# Altium PCB ADCS_Sensor_Simulator.PcbDoc
Units mm, origin at the board's own origin, x right, y up, seen from the top; angles counter-clockwise.
Board outline 152.4 x 101.6 mm, 2 copper layers (Top Layer, Bottom Layer); 45 components, 36 nets, 211 pads, 74 vias.
Unrouted connection lines stored in the file: 1.
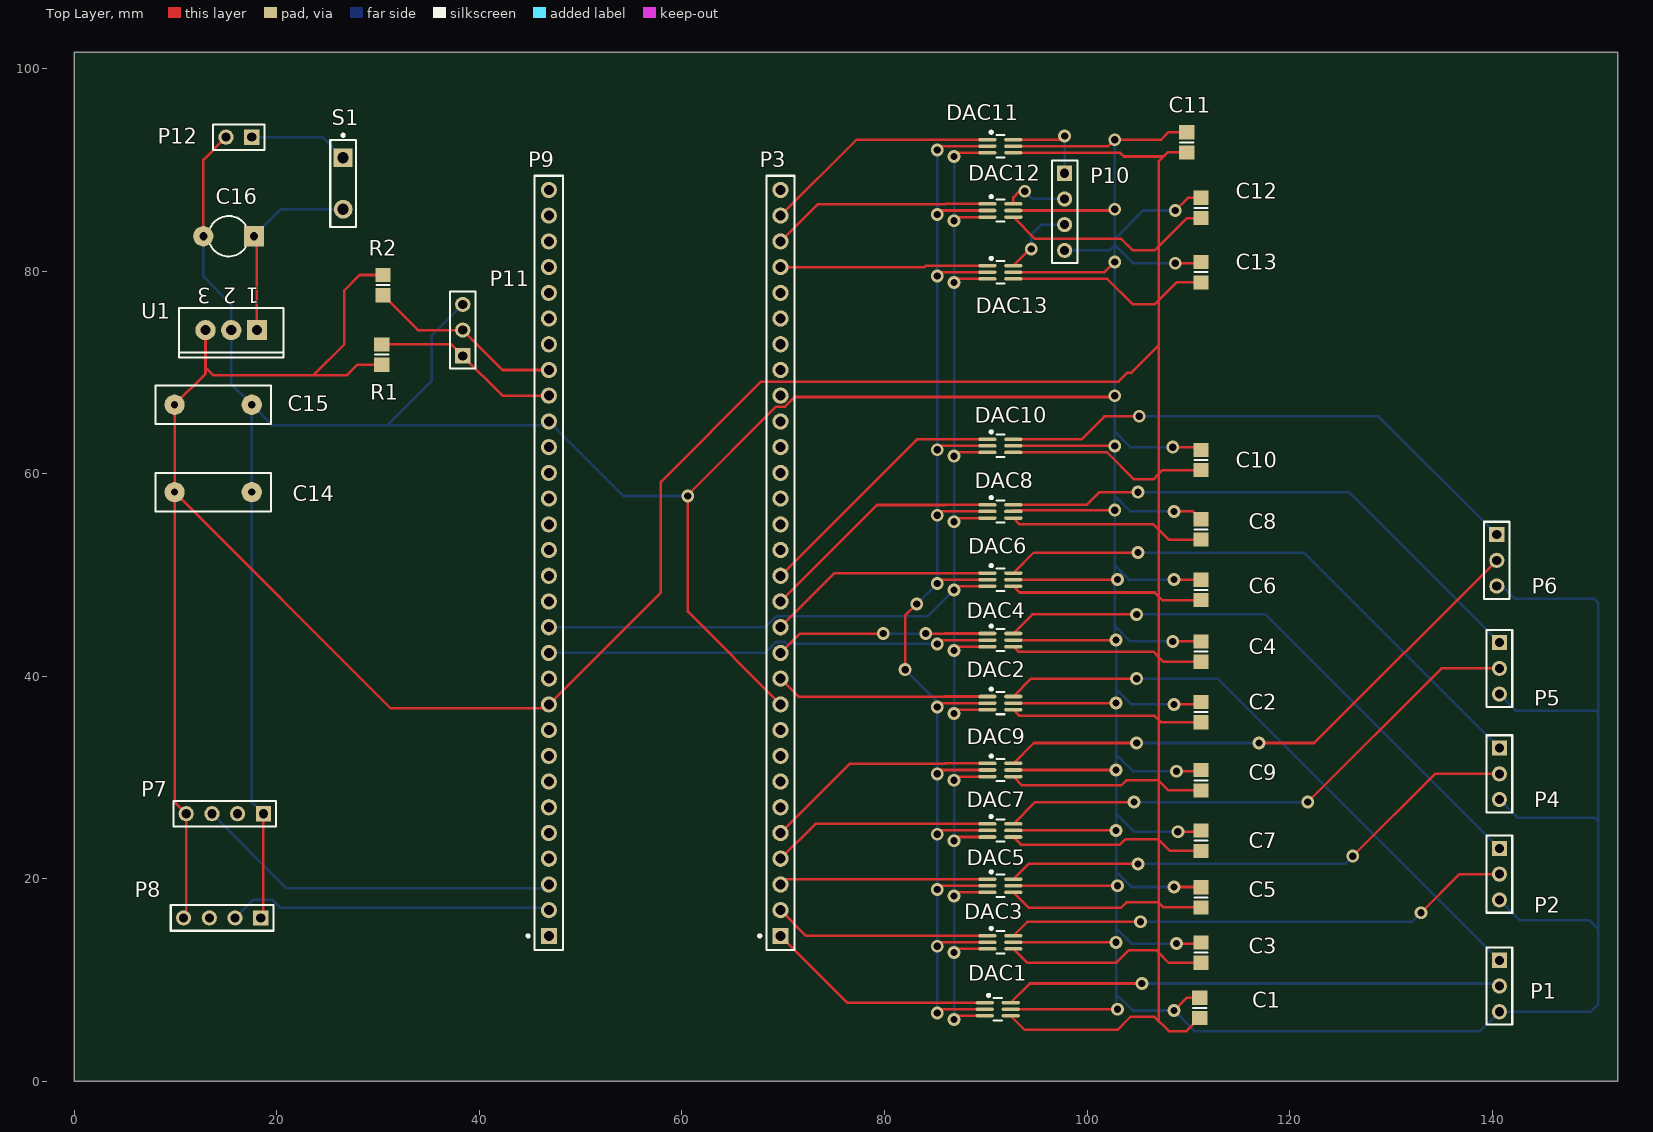
[diagram p0: Top Layer view]
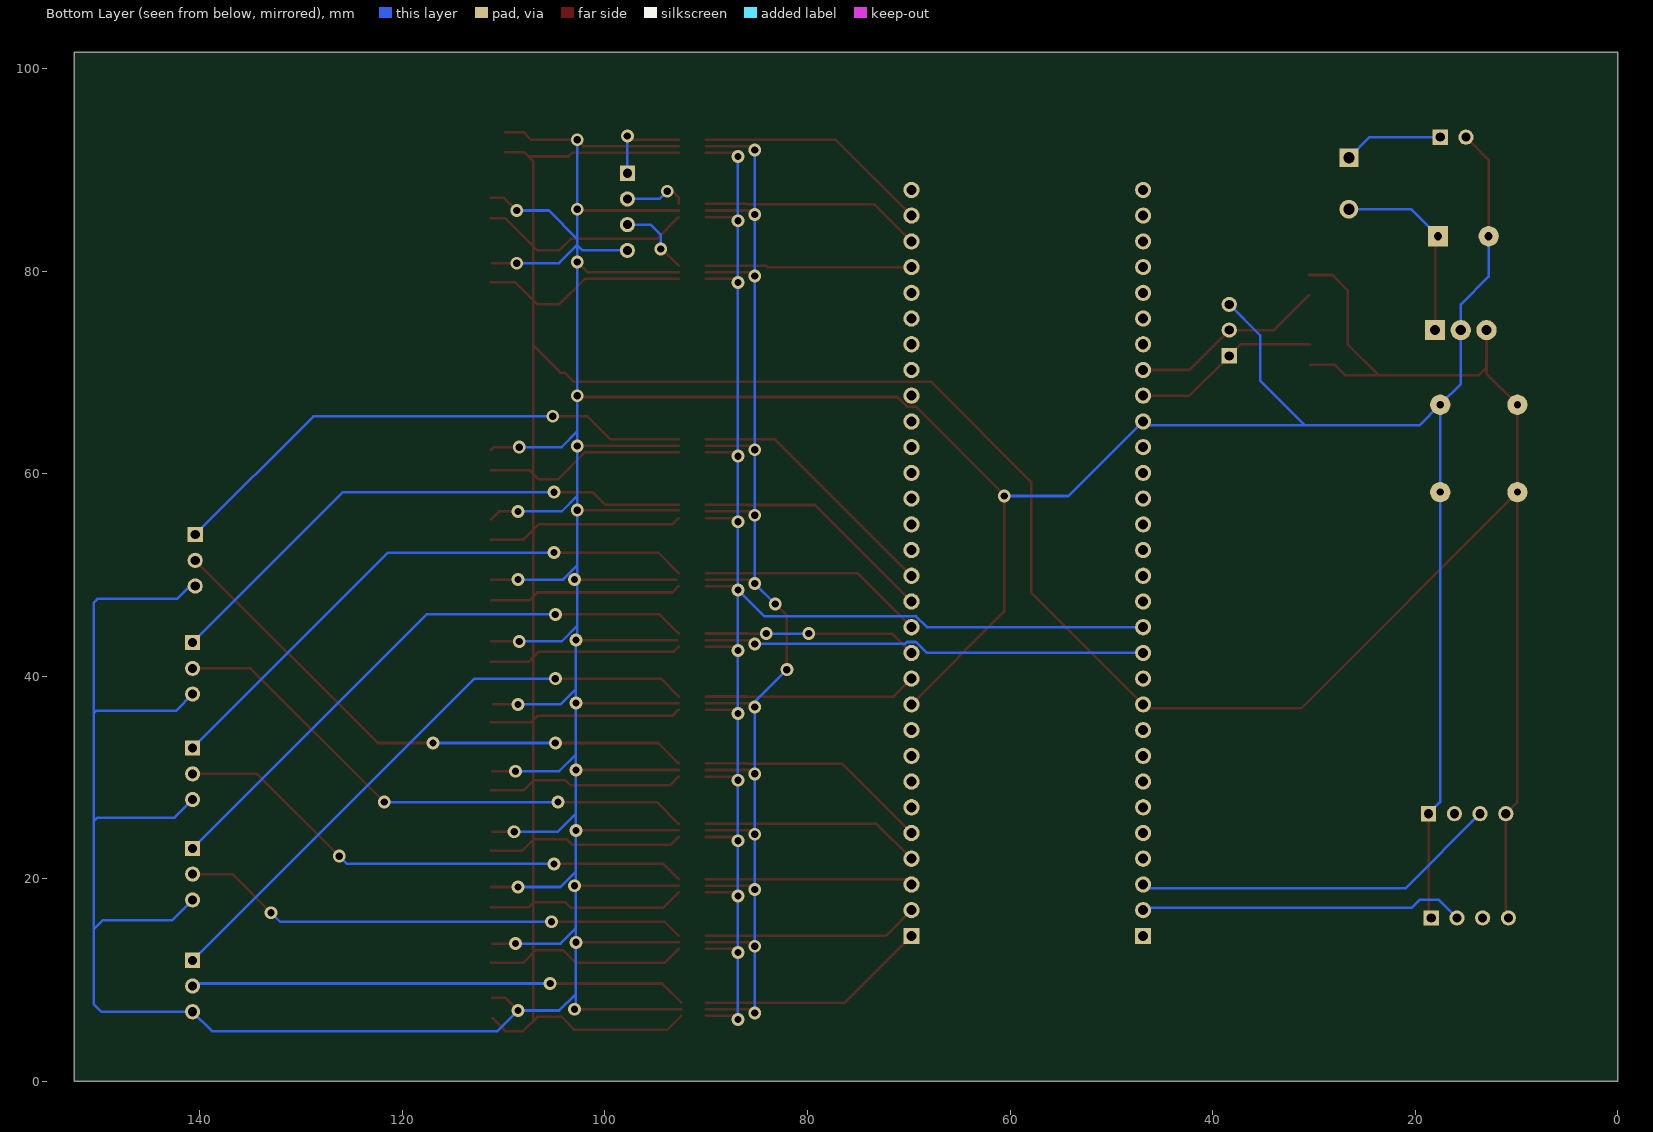
[diagram p1: Bottom Layer view, seen from below]

## Layer stack, top to bottom
Top Layer: signal copper 0.0356
Dielectric: dielectric 0.32, FR-4, Dk 4.8
Bottom Layer: signal copper 0.0356

## Board outline
0,0 152.4,0 152.4,101.6 0,101.6

## Design rules (kind name [scope] priority, off if disabled: settings)
Clearance [All] p1: gap=0.15
PolygonConnect [All] p1: connectstyle=Relief reliefconductorwidth=0.254 reliefentries=4 polygonreliefangle="90 Angle" airgapwidth=0.254
RoutingVias [All] p1: holewidth=0.711 width=1.27 viastyle="Through Hole" minholewidth=0.711 minwidth=1.27 maxholewidth=0.711 maxwidth=1.27
SolderMaskExpansion [All] p1: expansion=0.102
Width [All] p1: maxlimit=0.254 minlimit=0.254 preferedwidth=0.254
28 further rules are at their usual default settings.

## Components (designator, comment, footprint, x,y, rotation, side; value= is the part's Value field where it differs from the comment)
C1 "Regulator" 6-0805_M 111.125,7.239 r90 top
C2 "Regulator" 6-0805_M 111.252,36.449 r90 top
C3 "Regulator" 6-0805_M 111.252,12.7 r90 top
C4 "Regulator" 6-0805_M 111.252,42.418 r90 top
C5 "Regulator" 6-0805_M 111.252,18.161 r90 top
C6 "Regulator" 6-0805_M 111.252,48.514 r90 top
C7 "Regulator" 6-0805_M 111.252,23.749 r90 top
C8 "Regulator" 6-0805_M 111.252,54.483 r90 top
C9 "Regulator" 6-0805_M 111.252,29.718 r90 top
C10 "Regulator" 6-0805_M 111.252,61.341 r90 top
C11 "Regulator" 6-0805_M 109.855,92.71 r90 top
C12 "Regulator" 6-0805_M 111.252,86.233 r90 top
C13 "Regulator" 6-0805_M 111.252,79.883 r90 top
C14 "Regulator" RAD-0.3 13.716,58.166 r0 top
C15 "Regulator" RAD-0.3 13.716,66.802 r0 top
C16 "Bypass" CAPR5-4X5 15.24,83.439 r180 top
DAC1 "LTC2630" LTC2630 91.186,7.112 r0 top
DAC2 "LTC2630" LTC2630 91.44,37.338 r0 top
DAC3 "LTC2630" LTC2630 91.44,13.716 r0 top
DAC4 "LTC2630" LTC2630 91.44,43.561 r0 top
DAC5 "LTC2630" LTC2630 91.44,19.304 r0 top
DAC6 "LTC2630" LTC2630 91.44,49.53 r0 top
DAC7 "LTC2630" LTC2630 91.44,24.765 r0 top
DAC8 "LTC2630" LTC2630 91.44,56.261 r0 top
DAC9 "LTC2630" LTC2630 91.44,30.734 r0 top
DAC10 "LTC2630" LTC2630 91.44,62.738 r0 top
DAC11 "LTC2630" LTC2630 91.44,92.329 r0 top
DAC12 "LTC2630" LTC2630 91.44,85.979 r0 top
DAC13 "LTC2630" LTC2630 91.44,79.883 r0 top
P1 "Sun1" HDR1X3 140.716,11.938 r270 top
P2 "Sun2" HDR1X3 140.716,22.987 r270 top
P3 "ATMEGA128-RIGHT" HDR1X30 69.733,14.351 r90 top
P4 "Sun3" HDR1X3 140.716,32.893 r270 top
P5 "Sun4" HDR1X3 140.716,43.307 r270 top
P6 "Sun5" HDR1X3 140.462,53.975 r270 top
P7 "Serial-ToPC" HDR1X4 18.669,26.416 r180 top
P8 "Serial-FromPC" HDR1X4 18.415,16.129 r180 top
P9 "ATMEGA128-LEFT" HDR1X30 46.863,14.351 r90 top
P10 "Mag" HDR1X4 97.79,89.662 r270 top
P11 "Gyro I2C" HDR1X3 38.354,71.628 r90 top
P12 "12V In" HDR1X2 17.526,93.218 r180 top
R1 "SCL Pullup" 6-0805_M 30.353,71.755 r90 top
R2 "SDA Pullup" 6-0805_M 30.48,78.613 r270 top
S1 "ON/OFF" SPST-2 26.543,88.646 r270 top
U1 "MC7800" 221A-06 15.494,74.168 r180 top

## Footprints (in the part's own frame and the unit in brackets; to place one, negate y for a bottom-side part, rotate by r counter-clockwise, add the part's x,y. Pads: shape width x height; smd on the part's side, far side on the other; paste and mask are expansions set on the pad)
6-0805_M [mm] "Chip Resistor, Body 2.0x1.2mm, IPC Low Density"
  rect 1.4x1.5 smd: 1(-1,0) 2(1,0)
  silkscreen extent 0,-0.65 0,0.65, body extent -1.07,-0.7 1.07,0.7, height 0.7
221A-06 [mm] "TO, Thru-Hole, Vertical, Heatsink Mounted; 3 In-Line Leads; Pitch 2.54 mm"
  rect 2x2 hole 1: 1(-2.54,0)
  round 2 hole 1: 2(0,0) 3(2.54,0)
  silkscreen extent -5.15,-2.2 5.15,2.7
CAPR5-4X5 [mm] "Capacitor; 2 Leads"
  rect 2x2 hole 0.8: 1(-2.5,0)
  round 2 hole 0.8: 2(2.5,0)
  silkscreen extent -1.69,-2 1.82,2
HDR1X2 [mm] "Connector; Header; 2 Position"
  rect 1.5x1.5 hole 0.9: 1(0,0)
  round 1.5 hole 0.9: 2(2.54,0)
  silkscreen extent -1.27,-1.27 3.81,1.27
HDR1X3 [mm] "Connector; Header; 3 Position"
  rect 1.5x1.5 hole 0.9: 1(0,0)
  round 1.5 hole 0.9: 2(2.54,0) 3(5.08,0)
  silkscreen extent -1.27,-1.27 6.35,1.27
HDR1X4 [mm] "Connector; Header; 4 Position"
  rect 1.5x1.5 hole 0.9: 1(0,0)
  round 1.5 hole 0.9: 2(2.54,0) 3(5.08,0) 4(7.62,0)
  silkscreen extent -1.27,-1.27 8.89,1.27
HDR1X30 [mm] "Connector; Header; 30 Position"
  rect 1.6x1.6 hole 0.99: 1(0,0)
  round 1.6 hole 0.99: 2(2.54,0) 3(5.08,0) 4(7.62,0) 5(10.16,0) 6(12.7,0) 7(15.24,0) 8(17.78,0) 9(20.32,0) 10(22.86,0) 11(25.4,0) 12(27.94,0) 13(30.48,0) 14(33.02,0) 15(35.56,0) 16(38.1,0) 17(40.64,0) 18(43.18,0) 19(45.72,0) 20(48.26,0) 21(50.8,0) 22(53.34,0) 23(55.88,0) 24(58.42,0) 25(60.96,0) 26(63.5,0) 27(66.04,0) 28(68.58,0) 29(71.12,0) 30(73.66,0)
  silkscreen extent -1.4,-1.4 75.06,2.17
LTC2630 [mm] "TSOP, 6-Leads, Body 2.00x1.25mm, Pitch 0.65mm, IPC Low Density"
  oval 1.8x0.35 smd: 1(-1.281,0.65) 2(-1.281,0) 3(-1.281,-0.65) 4(1.281,-0.65) 5(1.281,0) 6(1.281,0.65)
  silkscreen extent -1.02,-1.1 0.4,1.5, body extent -0.7,-1.1 0.7,1.1, height 1
RAD-0.3 [mm] "Radial Cap, Thru-Hole; 2 Leads; 0.3 in Pin Spacing"
  round 2 hole 0.7: 1(-3.81,0) 2(3.81,0)
  silkscreen extent -5.71,-1.91 5.71,1.91
SPST-2 [mm] "Switch; 2 Leads"
  rect 1.85x1.85 hole 1.1: 1(-2.54,0)
  round 1.85 hole 1.1: 2(2.54,0)
  silkscreen extent -4.89,-1.27 4.28,1.27

## Part data
C1 C2 C3 C4 C5 C6 C7 C8 C9 C10 C11 C12 C13 C14 C15: library part Cap, "Capacitor"
C16: library part Cap2, "Capacitor"
P1 P2 P4 P5 P6 P11: library part "Header 3", "Header, 3-Pin"
P3 P9: library part "Header 30", "Header, 30-Pin"
P7 P8 P10: library part "Header 4", "Header, 4-Pin"
P12: library part "Header 2", "Header, 2-Pin"
R1 R2: library part Res2, "Resistor"
S1: library part SW-PB, "Switch"
U1: library part MC7805ACT, "Three-Terminal Positive Voltage Regulator"

## Via types
v1: diameter 1.27, hole 0.711, Top Layer to Bottom Layer, 74 vias

## Nets (pads, with @x,y where several pads share a name; then routed paths per layer and width w, separated by ;. In a path a pad name is that pad's centre, name@x,y a point inside that pad or via, vN(x,y) a via of type N, cw(c..) or ccw(c..) an arc to the next point about the centre after c; other vN are vias at no path point)
AZ1: DAC2.6 P1.1 | length 60.2
  Top Layer w0.254: DAC2.6 94.484,39.751 v1(104.902,39.751)
  Bottom Layer w0.254: v1(104.902,39.751) 112.903,39.751 P1.1
AZ2: DAC4.6 P2.1 | length 58.4
  Top Layer w0.254: DAC4.6 94.611,46.101 v1(104.902,46.101)
  Bottom Layer w0.254: v1(104.902,46.101) 117.602,46.101 P2.1
AZ3: DAC6.6 P4.1 | length 56.8
  Top Layer w0.254: DAC6.6 94.738,52.197 v1(105.029,52.197)
  Bottom Layer w0.254: v1(105.029,52.197) 121.412,52.197 P4.1
AZ4: DAC8.6 P5.1 | length 54.7
  Top Layer w0.254: DAC8.6 99.964,56.911 101.219,58.166 v1(105.029,58.166)
  Bottom Layer w0.254: v1(105.029,58.166) 125.857,58.166 P5.1
AZ5: DAC10.6 P6.1 | length 53.5
  Top Layer w0.254: DAC10.6 99.456,63.388 101.727,65.659 v1(105.156,65.659)
  Bottom Layer w0.254: v1(105.156,65.659) 128.778,65.659 P6.1
EL1: DAC1.6 P1.2 | length 48.8
  Top Layer w0.254: DAC1.6 94.357,9.652 v1(105.41,9.652)
  Bottom Layer w0.254: v1(105.41,9.652) P1.2@140.462,9.652
EL2: DAC3.6 P2.2 | length 50.5
  Top Layer w0.254: DAC3.6 94.103,15.748 v1(105.283,15.748) ; v1(132.969,16.637) 136.779,20.447 P2.2
  Bottom Layer w0.254: v1(105.283,15.748) 132.08,15.748 v1(132.969,16.637)
EL3: DAC5.6 P4.2 | length 52.3
  Top Layer w0.254: DAC5.6 94.23,21.463 v1(105.029,21.463) ; v1(126.238,22.225) 134.366,30.353 P4.2
  Bottom Layer w0.254: v1(105.029,21.463) 125.476,21.463 v1(126.238,22.225)
EL4: DAC7.6 P5.2 | length 54.4
  Top Layer w0.254: DAC7.6 94.865,27.559 v1(104.648,27.559) ; v1(121.793,27.559) 135.001,40.767 P5.2
  Bottom Layer w0.254: v1(104.648,27.559) v1(121.793,27.559)
EL5: DAC9.6 P6.2 | length 56
  Top Layer w0.254: DAC9.6 94.738,33.401 v1(104.902,33.401) ; v1(116.967,33.401) 122.428,33.401 P6.2
  Bottom Layer w0.254: v1(104.902,33.401) v1(116.967,33.401)
GND: C1.2 C2.2 C3.2 C4.2 C5.2 C6.2 C7.2 C8.2 C9.2 C10.2 C11.2 C12.2 C13.2 C14.2 C15.2 C16.2 DAC1.5 DAC2.5 DAC3.5 DAC4.5 DAC5.5 DAC6.5 DAC7.5 DAC8.5 DAC9.5 DAC10.5 DAC11.5 DAC12.5 DAC13.5 P1.3 P2.3 P3.10 P4.3 P5.3 P6.3 P7.1 P8.1 P9.21 P10.4 P11.3 P12.2 U1.2 | length 679.9
  Top Layer w0.254: C16.2 12.74,90.972 P12.2 ; P8.1 18.669,16.383 P7.1 ; P3.10 60.579,46.365 v1(60.579,57.785) 60.579,57.912 69.281,66.614 70.179,66.614 71.129,67.564 v1@102.743,67.564 ; DAC1.5 v1(102.997,7.112) ; DAC3.5 v1(102.87,13.716) ; DAC5.5 v1(102.997,19.304) ; DAC7.5 v1(102.87,24.765) ; DAC9.5 v1(102.87,30.734) ; DAC2.5 v1(102.87,37.338) ; DAC8.5@92.721,56.388 v1(102.743,56.388) ; DAC10.5 v1(102.743,62.738) ; DAC13.5 101.727,79.883 v1(102.743,80.899) ; DAC12.5 v1@102.743,85.979 ; DAC11.5 102.108,92.329 v1(102.743,92.964) 107.315,92.964 108.061,93.71 C11.2 ; DAC4.5@92.848,43.561 v1(102.87,43.561) ; DAC6.5@92.975,49.53 v1(102.997,49.53) ; v1(108.458,43.434) C4.2@111.236,43.434 ; v1(108.458,62.611) 110.982,62.611 C10.2 ; v1(108.585,6.985) 109.839,8.239 C1.2 ; v1(108.585,19.177) C5.2@111.236,19.177 ; v1(108.585,37.211) C2.2@111.014,37.211 ; v1(108.585,49.53) C6.2@111.236,49.53 ; v1(108.585,56.261) 110.474,56.261 C8.2 ; v1(108.712,80.772) C13.2@111.141,80.772 ; v1(108.712,85.979) 109.966,87.233 C12.2 ; v1(108.839,13.589) C3.2@111.141,13.589 ; v1(108.839,30.607) C9.2@111.141,30.607 ; v1(108.966,24.638) C7.2@111.141,24.638
  Bottom Layer w0.254: C16.2 12.74,79.462 15.494,76.708 U1.2 15.494,68.834 C15.2 ; P7.1 17.526,27.559 C14.2 C15.2 ; P11.3 35.306,73.66 35.306,69.215 30.861,64.77 ; P9.21@46.863,64.77 30.861,64.77 ; P9.21 54.229,57.785 v1(60.579,57.785) ; P10.4 102.235,82.042 102.743,82.55 ; v1@102.743,43.688 102.743,44.958 ; v1(102.743,92.964) v1(102.743,86.106) 102.743,83.185 ; v1@102.87,7.239 102.87,8.636 ; v1(102.87,43.561) 102.87,38.735 ; 107.061,43.434 104.267,43.434 102.743,44.958 ; 107.061,56.261 104.267,56.261 102.743,57.785 ; 107.188,43.434 v1(108.458,43.434) ; 107.188,56.261 v1(108.585,56.261) ; v1(108.458,62.611) 104.267,62.611 102.743,64.135 ; v1(108.585,19.177) 104.394,19.177 102.87,20.701 ; v1(108.585,37.211) 104.394,37.211 102.87,38.735 ; v1(108.585,49.53) 104.14,49.53 102.743,50.927 ; v1(108.712,80.772) 104.521,80.772 102.743,82.55 ; v1(108.712,85.979) 105.537,85.979 102.743,83.185 ; v1(108.839,13.589) 104.394,13.589 102.87,15.113 ; v1(108.839,30.607) 104.521,30.607 102.87,32.258 ; v1(108.966,24.638) 104.648,24.638 102.87,26.416 ; P2.3 142.748,15.875 149.606,15.875 150.495,14.986 ; P4.3 142.494,26.035 150.114,26.035 150.495,25.654 ; P5.3 142.367,36.576 150.241,36.576 150.495,36.322 ; P6.3@140.716,48.895 140.97,48.895 142.24,47.625 150.114,47.625 150.495,47.244 150.495,36.322 ; C15.2 19.558,64.77 30.861,64.77 ; 102.743,44.958 102.743,50.927 ; 102.743,50.927 v1(102.743,56.388) 102.743,57.785 ; 102.743,57.785 v1(102.743,62.738) 102.743,64.135 ; 102.743,64.135 v1(102.743,67.691) v1(102.743,80.899) 102.743,82.55 ; 102.743,82.55 102.743,83.185 ; 102.87,8.636 v1(102.87,13.716) 102.87,15.113 ; 102.87,8.636 104.521,6.985 v1(108.585,6.985) 110.617,4.953 138.811,4.953 P1.3 149.733,6.858 150.495,7.62 150.495,14.986 ; 102.87,15.113 102.87,20.701 ; 102.87,20.701 v1(102.87,24.765) 102.87,26.416 ; 102.87,26.416 v1(102.87,30.734) 102.87,32.258 ; 102.87,32.258 v1(102.87,37.338) 102.87,38.735 ; 150.495,14.986 150.495,25.654 ; 150.495,25.654 150.495,36.322
MAGX: DAC11.6 P10.1 | length 9.1
  Top Layer w0.254: DAC11.6 97.775,92.979 97.79,92.994 v1(97.79,93.345)
  Bottom Layer w0.254: P10.1 v1(97.79,93.345)
MAGY: DAC12.6 P10.2 | length 6.3
  Top Layer w0.254: DAC12.6 92.721,87.26 93.345,87.884 v1(93.853,87.884)
  Bottom Layer w0.254: v1(93.853,87.884) 94.615,87.122 P10.2
MAGZ: DAC13.6 P10.3 | length 7.6
  Top Layer w0.254: DAC13.6 94.357,82.169 v1(94.488,82.169)
  Bottom Layer w0.254: v1(94.488,82.169) 94.488,83.566 95.504,84.582 P10.3
NetC16_1: C16.1 S1.2 U1.1 | length 19.5
  Top Layer w0.254: C16.1 18.034,83.439 U1.1
  Bottom Layer w0.254: C16.1 20.407,86.106 S1.2
NetP7_3: P7.3 P9.3 | length 36.3
  Bottom Layer w0.254: P7.3 20.955,19.05 P9.3@46.863,19.05
NetP8_2: P8.2 P9.2 | length 31.8
  Bottom Layer w0.254: P8.2 17.653,17.907 19.558,17.907 20.32,17.145 P9.2@46.609,17.145
PA0: DAC2.1 P3.11 | length 21
  Top Layer w0.254: P3.11 71.511,37.973 85.979,37.973 85.994,37.988 DAC2.1@90.032,37.988
PA1: DAC4.1 P3.12 | length 21.1
  Top Layer w0.254: P3.12 71.638,44.196 v1(79.883,44.196) ; v1(84.074,44.196) 85.979,44.196 85.994,44.211 DAC4.1@90.032,44.211
  Bottom Layer w0.254: v1(79.883,44.196) v1(84.074,44.196)
PA2: DAC6.1 P3.13 | length 22.5
  Top Layer w0.254: P3.13 75.067,50.165 85.979,50.165 85.994,50.18 DAC6.1@90.032,50.18
PA3: DAC8.1 P3.14 | length 24.3
  Top Layer w0.254: P3.14 79.258,56.896 85.979,56.896 85.994,56.911 DAC8.1@90.032,56.911
PA4: DAC10.1 P3.15 | length 25.9
  Top Layer w0.254: P3.15 83.195,63.373 85.979,63.373 85.994,63.388 DAC10.1@90.032,63.388
PC0: DAC11.1 P3.29 | length 23.4
  Top Layer w0.254: P3.29 77.226,92.964 84.074,92.964 85.979,92.964 85.994,92.979 DAC11.1@90.032,92.979
PC1: DAC12.1 P3.28 | length 21.8
  Top Layer w0.254: P3.28 73.416,86.614 84.074,86.614 85.979,86.614 85.994,86.629 DAC12.1@90.032,86.629
PC2: DAC13.1 P3.27 | length 20.4
  Top Layer w0.254: P3.27 83.947,80.391 84.074,80.518 85.979,80.518 85.994,80.533 DAC13.1@90.032,80.533
PF0: DAC1.1 P3.1 | length 23
  Top Layer w0.254: P3.1 76.337,7.747 85.979,7.747 85.994,7.762 DAC1.1 DAC1.1@90.032,7.762
PF1: DAC3.1 P3.2 | length 21.4
  Top Layer w0.254: P3.2 72.273,14.351 85.979,14.351 85.994,14.366 DAC3.1@90.032,14.366
PF2: DAC5.1 P3.3 | length 20.5
  Top Layer w0.254: P3.3 70.256,19.954 DAC5.1@90.032,19.954
PF3: DAC7.1 P3.4 | length 21.7
  Top Layer w0.254: P3.4 73.177,25.415 DAC7.1@90.032,25.415
PF4: DAC9.1 P3.5 | length 23.1
  Top Layer w0.254: P3.5 76.591,31.369 85.979,31.369 85.994,31.384 DAC9.1@90.032,31.384
POWER: P12.1 S1.1 | length 9.9
  Bottom Layer w0.254: P12.1 24.511,93.218 S1.1
"SPI - MOSI": DAC1.3 DAC2.3 DAC3.3 DAC4.3 DAC5.3 DAC6.3 DAC7.3 DAC8.3 DAC9.3 DAC10.3 DAC11.3 DAC12.3 DAC13.3 P9.13 | length 172.5
  Top Layer w0.254: v1(86.868,6.096) 86.868,6.447 86.883,6.462 DAC1.3@90.032,6.462 ; v1(86.868,12.7) 86.868,13.051 86.883,13.066 DAC3.3@90.032,13.066 ; v1(86.868,18.288) 86.868,18.639 86.883,18.654 DAC5.3@90.032,18.654 ; v1(86.868,23.749) 86.868,24.1 86.883,24.115 DAC7.3@90.032,24.115 ; v1(86.868,29.718) 86.868,30.069 86.883,30.084 DAC9.3@90.032,30.084 ; v1(86.868,36.322) 86.868,36.673 86.883,36.688 DAC2.3@90.032,36.688 ; v1(86.868,42.545) 86.868,42.896 86.883,42.911 DAC4.3@90.032,42.911 ; v1(86.868,48.514) 86.868,48.865 86.883,48.88 DAC6.3@90.032,48.88 ; v1(86.868,55.245) 86.868,55.596 86.883,55.611 DAC8.3@90.032,55.611 ; v1(86.868,61.722) 86.868,62.073 86.883,62.088 DAC10.3@90.032,62.088 ; v1(86.868,78.867) 86.868,79.218 86.883,79.233 DAC13.3@90.032,79.233 ; v1(86.868,84.963) 86.868,85.314 86.883,85.329 DAC12.3@90.032,85.329 ; v1(86.868,91.313) 86.868,91.664 86.883,91.679 DAC11.3@90.032,91.679
  Bottom Layer w0.254: P9.13 68.21,44.831 69.287,45.908 84.262,45.908 v1(86.868,48.514) ; v1(86.868,6.096) v1(86.868,12.7) v1(86.868,18.288) v1(86.868,23.749) v1(86.868,29.718) v1(86.868,36.322) v1(86.868,42.545) v1(86.868,48.514) ; v1(86.868,91.313) v1(86.868,84.963) v1(86.868,78.867) v1(86.868,61.722) v1(86.868,55.245) v1(86.868,48.514)
"SPI - SCK": DAC1.2 DAC2.2 DAC3.2 DAC4.2 DAC5.2 DAC6.2 DAC7.2 DAC8.2 DAC9.2 DAC10.2 DAC11.2 DAC12.2 DAC13.2 P9.12 | length 191.4
  Top Layer w0.254: v1(82.042,40.64) 82.042,45.974 v1(83.185,47.117) ; v1(85.217,6.731) 85.598,7.112 DAC1.2@90.032,7.112 ; v1(85.217,13.335) 85.598,13.716 DAC3.2@90.032,13.716 ; v1(85.217,18.923) 85.598,19.304 DAC5.2@90.032,19.304 ; v1(85.217,24.384) 85.598,24.765 DAC7.2@90.032,24.765 ; v1(85.217,30.353) 85.598,30.734 DAC9.2@90.032,30.734 ; v1(85.217,36.957) 85.598,37.338 DAC2.2@90.032,37.338 ; v1(85.217,43.18) 85.598,43.561 DAC4.2@90.032,43.561 ; v1(85.217,49.149) 85.598,49.53 DAC6.2@90.032,49.53 ; v1(85.217,55.88) 85.598,56.261 DAC8.2@90.032,56.261 ; v1(85.217,62.357) 85.598,62.738 DAC10.2@90.032,62.738 ; v1(85.217,79.502) 85.598,79.883 DAC13.2@90.032,79.883 ; v1(85.217,85.598) 85.598,85.979 DAC12.2@90.032,85.979 ; v1(85.217,91.948) 85.598,92.329 DAC11.2@90.032,92.329
  Bottom Layer w0.254: P9.12 68.21,42.291 69.287,43.368 70.179,43.368 70.367,43.18 v1(85.217,43.18) ; v1(82.042,40.64) 85.217,37.465 v1(85.217,36.957) v1(85.217,30.353) v1(85.217,24.384) v1(85.217,18.923) v1(85.217,13.335) v1(85.217,6.731) ; v1(83.185,47.117) v1(85.217,49.149) v1(85.217,55.88) v1(85.217,62.357) v1(85.217,79.502) v1(85.217,85.598) v1(85.217,91.948)
"TWI - SCL": P9.22 P11.1 R1.2 | length 18.6
  Top Layer w0.254: R1.2 37.227,72.755 P11.1 42.291,67.691 P9.22
"TWI - SDA": P9.23 P11.2 R2.2 | length 19.4
  Top Layer w0.254: R2.2 33.925,74.168 P11.2 42.291,70.231 P9.23
VCC: C1.1 C2.1 C3.1 C4.1 C5.1 C6.1 C7.1 C8.1 C9.1 C10.1 C11.1 C12.1 C13.1 C14.1 C15.1 DAC1.4 DAC2.4 DAC3.4 DAC4.4 DAC5.4 DAC6.4 DAC7.4 DAC8.4 DAC9.4 DAC10.4 DAC11.4 DAC12.4 DAC13.4 P7.4 P8.4 P9.10 R1.1 R2.1 U1.3 | length 559.9
  Top Layer w0.254: P8.4 11.049,16.383 P7.4 9.906,27.559 C14.1 ; U1.3 12.954,70.485 ; R1.1 27.956,70.755 26.924,69.723 23.622,69.723 ; R2.1 28.178,79.613 26.67,78.105 26.67,72.771 23.622,69.723 ; P9.10@46.863,36.83 31.242,36.83 C14.1 ; P9.10 57.912,48.26 57.912,59.182 67.818,69.088 103.124,69.088 104.013,69.977 104.394,69.977 107.061,72.644 ; DAC1.4 93.849,5.08 102.997,5.08 104.267,6.35 106.68,6.35 108.077,4.953 109.839,4.953 C1.1 ; DAC3.4 94.103,11.684 102.87,11.684 104.14,12.954 106.807,12.954 107.061,12.7 ; DAC5.4 94.23,17.145 103.378,17.145 103.886,17.653 107.061,17.653 ; DAC7.4 93.472,23.364 103.247,23.364 103.759,23.876 107.061,23.876 ; DAC9.4 93.595,29.21 103.378,29.21 103.886,29.718 107.061,29.718 ; DAC2.4 93.341,36.068 106.68,36.068 107.299,35.449 C2.1 ; DAC4.4 93.214,42.418 106.553,42.418 107.061,41.91 ; DAC6.4 93.341,48.26 106.68,48.26 107.061,47.879 ; DAC8.4 93.341,54.991 106.553,54.991 107.061,54.483 ; DAC10.4 101.996,62.088 104.648,59.436 106.553,59.436 107.061,59.944 ; DAC13.4 101.996,79.233 104.521,76.708 106.68,76.708 107.061,77.089 ; DAC12.4 94.865,83.185 103.378,83.185 104.521,82.042 106.68,82.042 107.061,82.423 ; DAC11.4 103.266,91.679 103.632,91.313 107.442,91.313 ; 107.061,5.969 107.061,12.7 ; 107.061,82.614 107.061,90.805 107.966,91.71 C11.1 ; C3.1 108.061,11.7 107.061,12.7 ; C5.1 107.553,17.161 107.061,17.653 ; C7.1 108.188,22.749 107.061,23.876 ; C9.1 108.061,28.718 107.061,29.718 ; C4.1 107.553,41.418 107.061,41.91 ; C6.1 107.426,47.514 107.061,47.879 ; C8.1 108.061,53.483 107.061,54.483 ; C10.1 107.458,60.341 107.061,59.944 ; C13.1 108.855,78.883 107.061,77.089 ; C12.1 109.871,85.233 107.061,82.423 ; C14.1 C15.1 12.954,69.85 12.954,70.485 ; 12.954,70.485 13.716,69.723 23.622,69.723 ; 107.061,12.7 107.061,17.653 ; 107.061,17.653 107.061,23.876 ; 107.061,23.876 107.061,29.718 ; 107.061,29.718 107.061,41.91 ; 107.061,41.91 107.061,47.879 ; 107.061,47.879 107.061,54.483 ; 107.061,54.483 107.061,59.944 ; 107.061,59.944 107.061,72.644 ; 107.061,72.644 107.061,77.089 ; 107.061,77.089 107.061,82.423
pads on no net: P3.6 P3.7 P3.8 P3.9 P3.16 P3.17 P3.18 P3.19 P3.20 P3.21 P3.22 P3.23 P3.24 P3.25 P3.26 P3.30 P7.2 P8.3 P9.1 P9.4 P9.5 P9.6 P9.7 P9.8 P9.9 P9.11 P9.14 P9.15 P9.16 P9.17 P9.18 P9.19 P9.20 P9.24 P9.25 P9.26 P9.27 P9.28 P9.29 P9.30

## Silkscreen, mask and mechanical layers (free items; w line width, h text height)
Mechanical 1:
  the board outline again, w1.2

## Text inside footprints (layer, text, board x,y; h text height)
U1: Top Overlay "3" at 13.454,78.343 h1.5 r180; Top Overlay "2" at 15.994,78.343 h1.5 r180; Top Overlay "1" at 18.284,78.343 h1.5 r180